# Altium PCB ADCS_BOARDV2.PcbDoc (part 1 of 2)
Units mm, origin at the board's own origin, x right, y up, seen from the top; angles counter-clockwise.
Board outline 92.58 x 92.46 mm, 2 copper layers (Top Layer, Bottom Layer); 139 components, 123 nets, 589 pads, 179 vias.
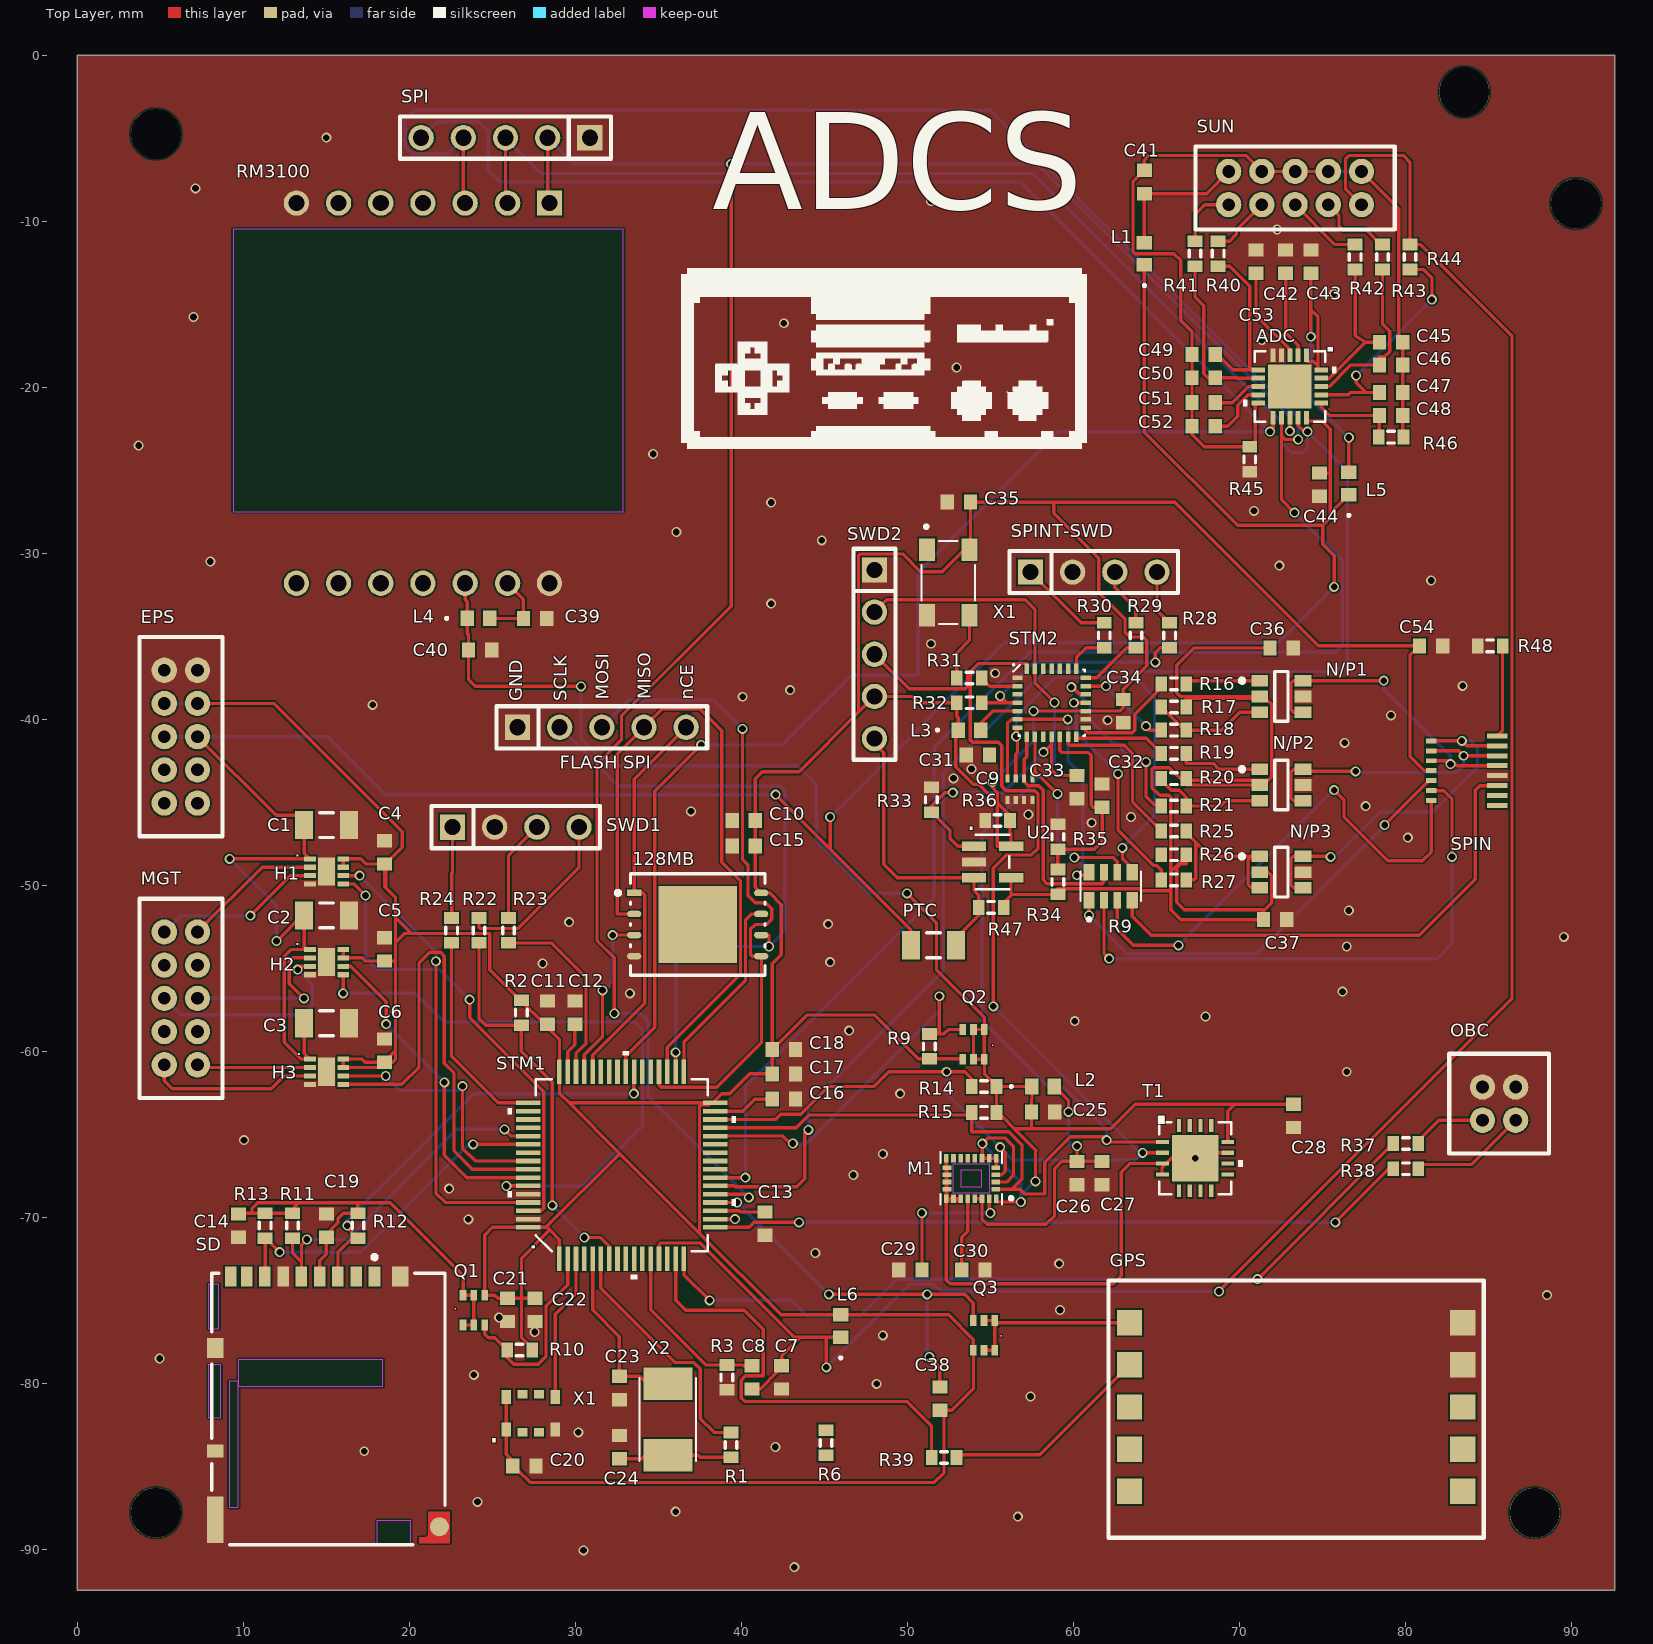
[diagram p0: Top Layer view]
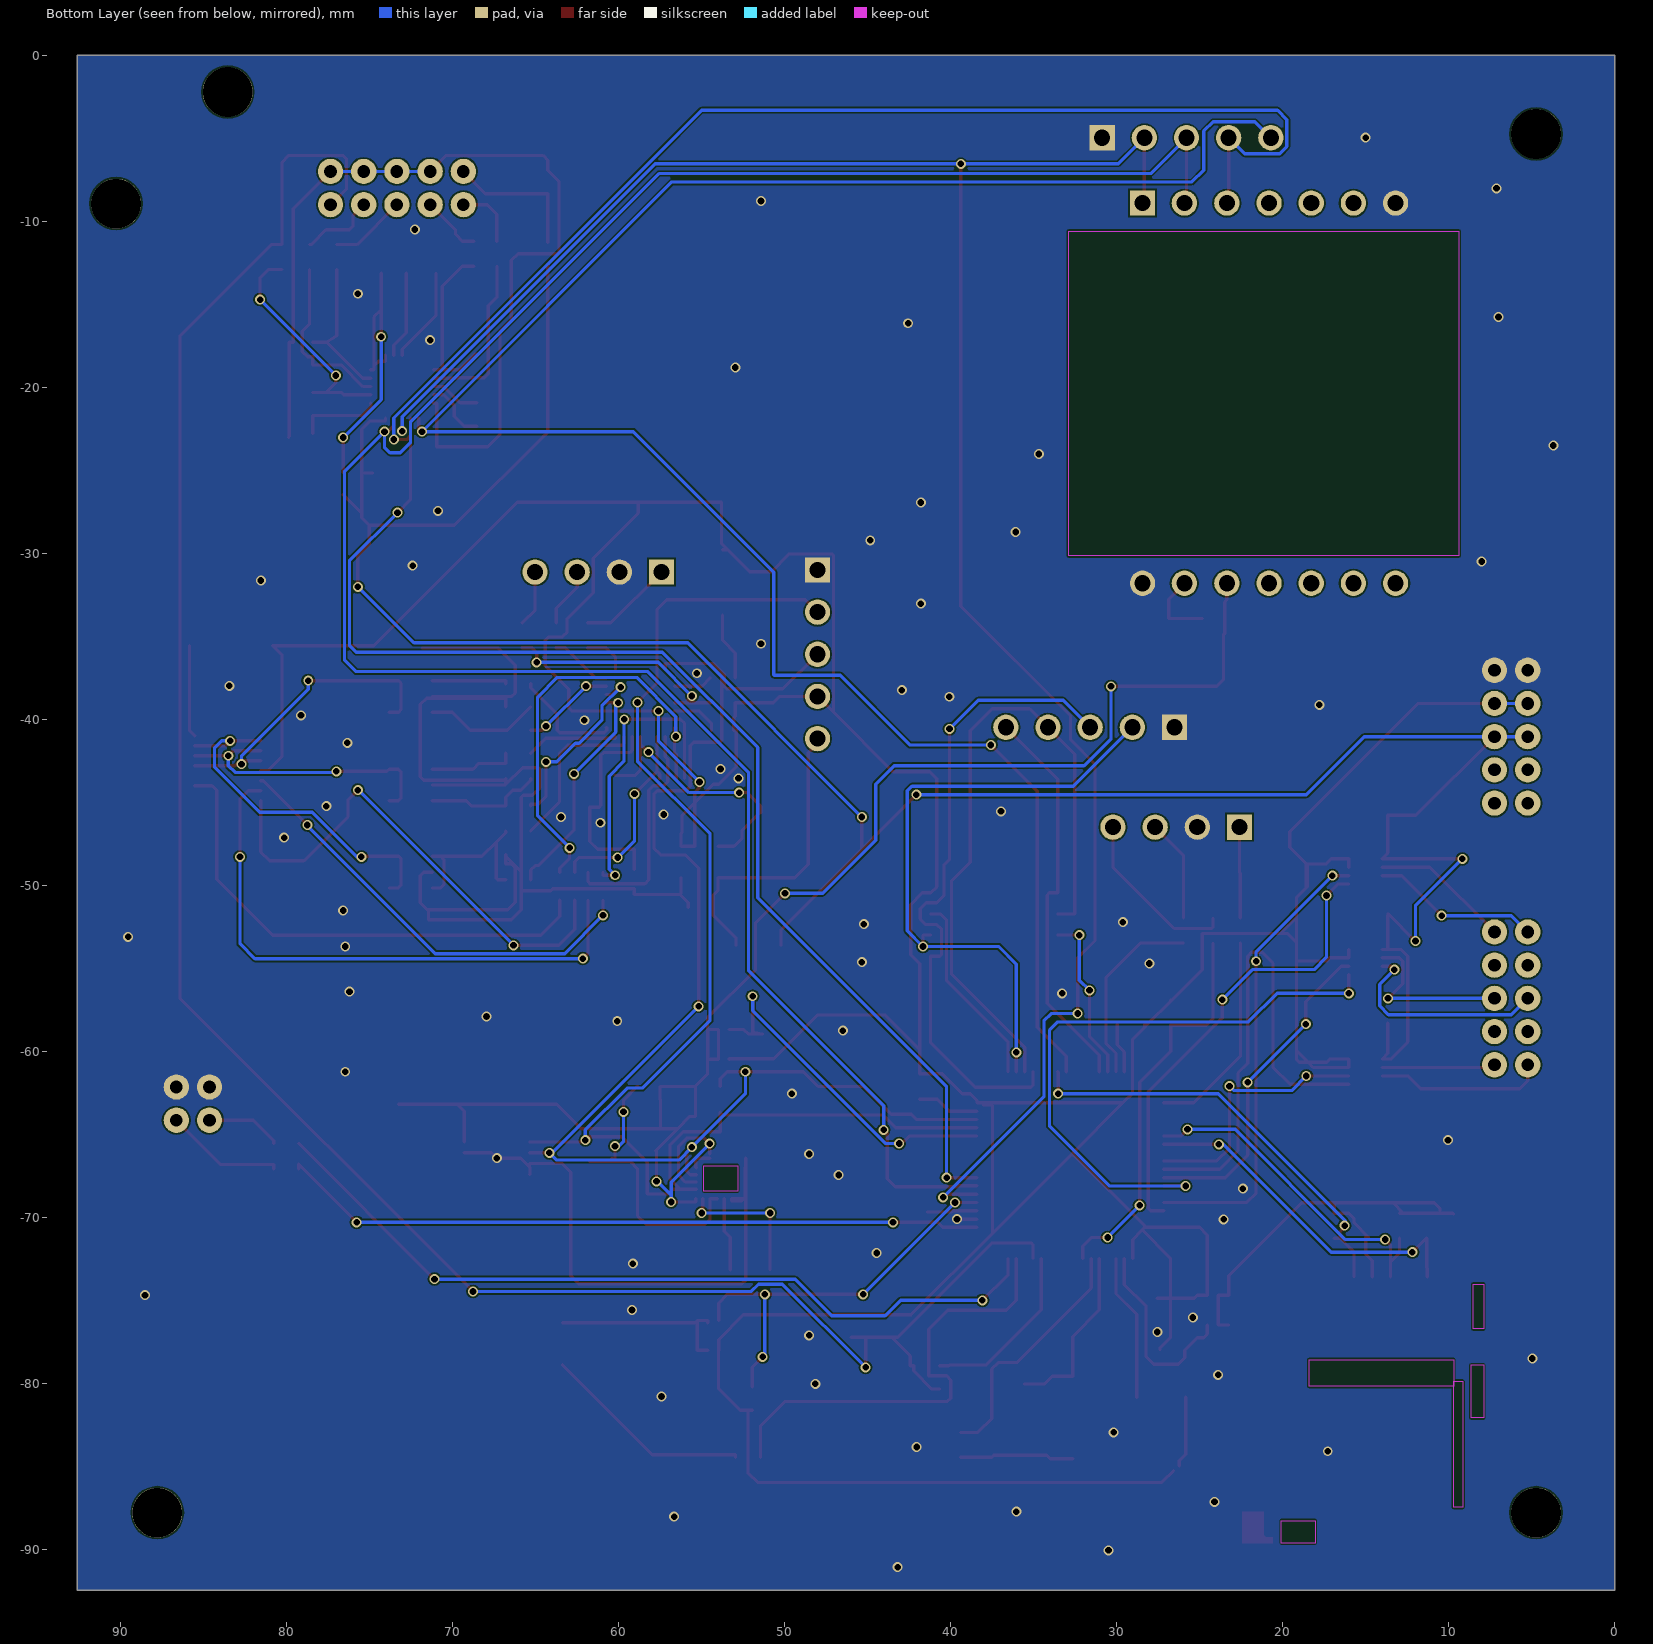
[diagram p1: Bottom Layer view, seen from below]

## Layer stack, top to bottom
Top Solder: solder mask 0.0102, Solder Resist, Dk 3.5
Top Layer: signal copper 0.0356
Dielectric 1: dielectric 0.32, FR-4, Dk 4.8
Bottom Layer: signal copper 0.0356
Bottom Solder: solder mask 0.0102, Solder Resist, Dk 3.5

## Board outline
0,-92.456 92.583,-92.456 92.583,0 0,0

## Design rules (kind name [scope] priority, off if disabled: settings)
Clearance [All] p1: gap=0.1 ignorepadtopadclearanceinfootprint=FALSE
PolygonConnect [All] p1: connectstyle=Direct reliefconductorwidth=0.254 reliefentries=4 polygonreliefangle="90 Angle" airgapwidth=0.254
RoutingTopology [All] p1: topology=Daisy_Simple
RoutingVias [All] p1: holewidth=0.4 width=0.6 viastyle="Through Hole" minholewidth=0.4 minwidth=0.6 maxholewidth=0.4 maxwidth=0.6
ShortCircuit ShortCircuit_1 [InNet('GND') vs InNet('GND_SEN')] p1: allowed=TRUE
ShortCircuit [All] p2: allowed=FALSE
SolderMaskExpansion [All] p1: expansion=0.05
UnRoutedNet [All] p1: checkbadconnections=TRUE
Width [All] p1: maxlimit=0.2 minlimit=0.1 preferedwidth=0.2 minimp=50.000000 maximp=50.000000 favimp=50.000000
27 further rules are at their usual default settings.

## Components (designator, comment, footprint, x,y, rotation, side; value= is the part's Value field where it differs from the comment)
128MB "Comment" ISSI_WSON-8_0 37.358,-52.347 r0 top
ADC "Comment" AD 73.025,-19.939 r270 top
C1 "C1" C1206 15,-46.355 r0 top
C2 "C2" C1206 15,-51.8 r0 top
C3 "C3" C1206 15,-58.3 r0 top
C4 "Comment" 1608[0603] 18.5,-48.006 r90 top
C5 "Comment" 1608[0603] 18.5,-53.848 r90 top
C6 "Comment" 1608[0603] 18.5,-59.944 r90 top
C7 "Comment" 1608[0603] 42.418,-79.629 r90 top
C8 "Comment" 1608[0603] 40.64,-79.629 r90 top
C9 "Comment" W2A4ZC104MAT2A 56.769,-44.196 r0 top
C10 "Comment" 1608[0603] 40.132,-46.08 r0 top
C11 "Comment" 1608[0603] 28.305,-57.658 r90 top
C12 "Comment" 1608[0603] 29.96,-57.658 r90 top
C13 "Comment" 1608[0603] 41.402,-70.363 r90 top
C14 "Comment" 1608[0603] 9.688,-70.485 r90 top
C15 "Comment" 1608[0603] 40.132,-47.625 r0 top
C16 "Comment" 1608[0603] 42.545,-62.865 r0 top
C17 "Comment" 1608[0603] 42.545,-61.341 r0 top
C18 "Comment" 1608[0603] 42.545,-59.874 r0 top
C19 "Comment" 1608[0603] 14.986,-70.485 r90 top
C20 "Comment" 1608[0603] 26.924,-84.963 r0 top
C21 "Comment" 1608[0603] 25.908,-75.565 r90 top
C22 "Comment" 1608[0603] 27.559,-75.565 r90 top
C23 "Comment" 1608[0603] 32.639,-80.264 r90 top
C24 "Comment" 1608[0603] 32.639,-83.82 r90 top
C25 "Comment" 1608[0603] 58.166,-63.627 r0 top
C26 "Comment" 1608[0603] 60.198,-67.315 r90 top
C27 "Comment" 1608[0603] 61.722,-67.315 r90 top
C28 "Comment" 1608[0603] 73.234,-63.872 r90 top
C29 "Comment" 1608[0603] 50.165,-73.152 r0 top
C30 "Comment" 1608[0603] 53.962,-73.152 r0 top
C31 "Comment" 1608[0603] 54.229,-42.143 r0 top
C32 "Comment" 1608[0603] 61.722,-44.577 r90 top
C33 "Comment" 1608[0603] 60.198,-44.069 r90 top
C34 "Comment" 1608[0603] 62.992,-39.489 r90 top
C35 "Comment" 1608[0603] 53.086,-26.903 r0 top
C36 "Comment" 1608[0603] 72.534,-35.687 r0 top
C37 "Comment" 1608[0603] 72.136,-52.049 r0 top
C38 "Comment" 1608[0603] 51.943,-80.899 r90 top
C39 "Comment" 1608[0603] 27.559,-33.909 r0 top
C40 "Comment" 1608[0603] 24.257,-35.814 r0 top
C41 "Comment" 1608[0603] 64.262,-7.62 r90 top
C42 "Comment" 1608[0603] 72.771,-12.411 r90 top
C43 "Comment" 1608[0603] 74.295,-12.411 r90 top
C44 "Comment" 1608[0603] 74.803,-25.848 r90 top
C45 "Comment" 1608[0603] 79.121,-17.272 r0 top
C46 "Comment" 1608[0603] 79.121,-18.648 r0 top
C47 "Comment" 1608[0603] 79.121,-20.299 r0 top
C48 "Comment" 1608[0603] 79.121,-21.684 r0 top
C49 "Comment" 1608[0603] 67.834,-18.001 r0 top
C50 "Comment" 1608[0603] 67.834,-19.41 r0 top
C51 "Comment" 1608[0603] 67.834,-20.914 r0 top
C52 "Comment" 1608[0603] 67.834,-22.331 r0 top
C53 "Comment" 1608[0603] 70.993,-12.411 r90 top
C54 "Comment" 1608[0603] 81.534,-35.56 r0 top
Designator1 "5pinSWD" 5pinSWD 1300.734,1233.043 r0 top
EPS "Comment" "2mm pitch con" 7.228,-37.031 r270 top
"FLASH SPI" "Comment" 5pinSWD 26.505,-40.466 r0 top
GPS "Comment" GPS 76.581,-78.232 r180 top
H1 "Comment" ?DRV8837DSGR? 15,-49.149 r0 top
H2 "Comment" ?DRV8837DSGR? 15,-54.61 r0 top
H3 "Comment" ?DRV8837DSGR? 15,-61.214 r0 top
L1 "Comment" IND_BLM18_0603 64.262,-11.938 r90 top
L2 "Comment" IND_BLM18_0603 58.166,-62.103 r0 top
L3 "Comment" IND_BLM18_0603 53.721,-40.64 r0 top
L4 "Comment" IND_BLM18_0603 24.157,-33.909 r0 top
L5 "Comment" IND_BLM18_0603 76.581,-25.781 r90 top
L6 "Comment" IND_BLM18_0603 45.974,-76.533 r90 top
M1 "Comment" *PQFN43P300X350X102-24N 53.838,-67.641 r180 top
MGT "Comment" "2mm pitch con" 7.228,-52.795 r270 top
N/P1 "Comment" FDC6333C 72.517,-38.608 r0 top
N/P2 "Comment" FDC6333C 72.517,-43.942 r0 top
N/P3 "Comment" FDC6333C 72.517,-49.192 r0 top
OBC "Comment" 2mm4way2row 84.63,-64.135 r90 top
PTC "Comment" C1206 51.562,-53.594 r0 top
Q1 "Comment" Si1401EDH 23.228,-76.466 r0 top
Q2 "Comment" Si1401EDH 54.623,-58.674 r180 top
Q3 "Comment" Si1401EDH 55.258,-76.2 r180 top
R1 "Comment" J1-0603 39.37,-83.693 r90 top
R2 "Comment" J1-0603 26.734,-57.658 r90 top
R3 "Comment" J1-0603 39.116,-79.629 r90 top
R6 "Comment" J1-0603 45.085,-83.566 r90 top
R9 "Comment" J1-0603 51.308,-59.69 r90 top
R9 "Comment" EXB 62.23,-50.038 r90 top
R10 "Comment" J1-0603 26.632,-77.978 r0 top
R11 "Comment" J1-0603 12.954,-70.485 r90 top
R12 "Comment" J1-0603 16.891,-70.485 r90 top
R13 "Comment" J1-0603 11.303,-70.485 r90 top
R14 "Comment" J1-0603 54.61,-62.103 r0 top
R15 "Comment" J1-0603 54.61,-63.659 r0 top
R16 "Comment" J1-0603 66.04,-37.846 r0 top
R17 "Comment" J1-0603 66.04,-39.243 r0 top
R18 "Comment" J1-0603 66.04,-40.64 r0 top
R19 "Comment" J1-0603 66.04,-42.037 r0 top
R20 "Comment" J1-0603 66.04,-43.561 r0 top
R21 "Comment" J1-0603 66.04,-45.212 r0 top
R22 "Comment" J1-0603 24.186,-52.705 r90 top
R23 "Comment" J1-0603 25.964,-52.705 r90 top
R24 "Comment" J1-0603 22.535,-52.705 r90 top
R25 "Comment" J1-0603 66.04,-46.711 r0 top
R26 "Comment" J1-0603 66.04,-48.142 r0 top
R27 "Comment" J1-0603 66.04,-49.657 r0 top
R28 "Comment" J1-0603 65.786,-34.925 r90 top
R29 "Comment" J1-0603 63.754,-34.925 r90 top
R30 "Comment" J1-0603 61.849,-34.925 r90 top
R31 "Comment" J1-0603 53.721,-37.496 r0 top
R32 "Comment" J1-0603 53.721,-38.989 r0 top
R33 "Comment" J1-0603 51.435,-44.831 r90 top
R34 "Comment" J1-0603 59.055,-49.784 r90 top
R35 "Comment" J1-0603 59.055,-47.061 r90 top
R36 "Comment" J1-0603 55.423,-46.08 r0 top
R37 "Comment" J1-0603 80.01,-65.532 r0 top
R38 "Comment" J1-0603 80.01,-67.056 r0 top
R39 "Comment" J1-0603 52.197,-84.455 r0 top
R40 "Comment" J1-0603 68.707,-11.938 r90 top
R41 "Comment" J1-0603 67.31,-11.938 r90 top
R42 "Comment" J1-0603 76.962,-12.138 r90 top
R43 "Comment" J1-0603 78.613,-12.138 r90 top
R44 "Comment" J1-0603 80.264,-12.138 r90 top
R45 "Comment" J1-0603 70.612,-24.324 r90 top
R46 "Comment" J1-0603 79.121,-22.987 r0 top
R47 "Comment" J1-0603 55.034,-51.308 r0 top
R48 "Comment" J1-0603 85.09,-35.56 r0 top
RM3100 "Comment" RM3100 28.428,-31.79 r180 top
SD "Comment" Hirose_Electric_DM3AT-SF-PEJM5_0 15.113,-81.534 r0 top
SPI "Comment" 5pinSWD 30.861,-4.953 r180 top
SPIN "Comment" FH23-15S-0.3SHAW 83.439,-43.081 r90 top
SPINT-SWD "Comment" 4pinSWD 57.404,-31.115 r0 top
STM1 "Comment" LQFP-64 32.778,-66.84 r90 top
STM2 "Comment" *QFN50P400X400X60-28N 58.674,-38.989 r0 top
SUN "Comment" "2mm pitch con" 69.342,-6.985 r0 top
SWD1 "Comment" 4pinSWD 22.591,-46.482 r0 top
SWD2 "Comment" 5pinSWD 48.006,-30.988 r270 top
T1 "Comment" ADT 67.32,-66.421 r0 top
U2 "Comment" INA139 55.118,-48.578 r0 top
X1 "Comment" ?KT3225T3 27.305,-81.788 r0 top
X1 "Comment" *OSC_ECS-TXO-5032-120-TR 52.451,-31.75 r270 top
X2 "Comment" ABM3XTAL 35.56,-82.169 r90 top

## Footprints (in the part's own frame and the unit in brackets; to place one, negate y for a bottom-side part, rotate by r counter-clockwise, add the part's x,y. Pads: shape width x height; smd on the part's side, far side on the other; paste and mask are expansions set on the pad)
2mm4way2row [mil]
  round 60 hole 30: 1(0,0) 2(78.74,0) 3(0,-78.74) 4(78.74,-78.74)
  silkscreen extent -79,-157 157,79, body extent -92,-163 170,85, height 252
"2mm pitch con" [mil]
  round 60 hole 30: 1(0,0) 2(0,-78.74) 3(78.74,0) 4(78.74,-78.74) 5(157.48,0) 6(157.48,-78.74) 7(236.22,0) 8(236.22,-78.74) 9(314.96,0) 10(314.96,-78.74)
  silkscreen extent -79,-138 394,59, body extent -79,-138 394,59, height 260
4pinSWD [mil]
  rect 60x60 hole 38.19: 1(0,0)
  round 60 hole 38.19: 2(100,0) 3(200,0) 4(300,0)
  silkscreen extent -50,-50 350,50
5pinSWD [mil]
  rect 60x60 hole 38.19: 1(0,0)
  round 60 hole 38.19: 2(100,0) 3(200,0) 4(300,0) 5(400,0)
  silkscreen extent -50,-50 450,50
1608[0603] [mm] "Chip Capacitor, Body 1.6x0.8mm, IPC High Density"
  rect 0.8x0.9 smd: 1(-0.7,0) 2(0.7,0)
  body extent -0.87,-0.48 0.87,0.48, height 1.3
*OSC_ECS-TXO-5032-120-TR [mm]
  rect 1.35x0.95 smd: 1(-1.975,-1.275) 2(1.975,-1.275) 3(1.975,1.275) 4(-1.975,1.275)
  silkscreen extent -3.47,-1.6 2.5,1.6
*PQFN43P300X350X102-24N [mm]
  rect 0.28x0.53 smd: 1(-1.505,1.22) 6(-1.505,-1.22) 7(-1.075,-1.22) 8(-0.645,-1.22) 9(-0.215,-1.22) 10(0.215,-1.22) 11(0.645,-1.22) 12(1.075,-1.22) 13(1.505,-1.22) 18(1.505,1.22) 19(1.075,1.22) 20(0.645,1.22) 21(0.215,1.22) 22(-0.215,1.22) 23(-0.645,1.22) 24(-1.075,1.22)
  rect 0.53x0.28 smd: 2(-1.47,0.645) 3(-1.47,0.215) 4(-1.47,-0.215) 5(-1.47,-0.645) 14(1.47,-0.645) 15(1.47,-0.215) 16(1.47,0.215) 17(1.47,0.645)
  Top Layer keep-out region: -0.645,-0.508 0.645,-0.508 0.645,0.508 -0.645,0.508
  Bottom Layer keep-out region: -1.016,-0.762 1.016,-0.762 1.016,0.762 -1.016,0.762
  silkscreen extent -2.5,-1.58 1.86,1.58
*QFN50P400X400X60-28N [mm]
  rect 0.62x0.27 smd: 1(-2.055,1.5) 2(-2.055,1) 3(-2.055,0.5) 4(-2.055,0) 5(-2.055,-0.5) 6(-2.055,-1) 7(-2.055,-1.5) 15(2.055,-1.5) 16(2.055,-1) 17(2.055,-0.5) 18(2.055,0) 19(2.055,0.5) 20(2.055,1) 21(2.055,1.5)
  rect 0.27x0.62 smd: 8(-1.5,-2.055) 9(-1,-2.055) 10(-0.5,-2.055) 11(0,-2.055) 12(0.5,-2.055) 13(1,-2.055) 14(1.5,-2.055) 22(1.5,2.055) 23(1,2.055) 24(0.5,2.055) 25(0,2.055) 26(-0.5,2.055) 27(-1,2.055) 28(-1.5,2.055)
  silkscreen extent -2.34,-2 2,2.34
?DRV8837DSGR? [mil]
  rect 28x12 smd: 1(-39.5,30) 2(-39.5,10) 3(-39.5,-10) 4(-39.5,-30) 5(39.5,-30) 6(39.5,-10) 7(39.5,10) 8(39.5,30)
  rect 40x67 smd paste-33 mask+0: 9(0,0)
  body extent 0,0 10,10, height 10
?KT3225T3 [mm]
  rect 0.55x0.85 smd: 1(-1.475,0.975) 4(1.475,0.975) 5(-1.475,-0.975) 8(1.475,-0.975)
  rect 0.6x0.5 smd: 2(-0.5,1.15) 3(0.5,1.15) 6(-0.5,-1.15) 7(0.5,-1.15)
ABM3XTAL [mm]
  rect 1.95x2.95 smd: 1(-2.15,0) 2(2.15,0)
  silkscreen extent -2.5,-1.7 2.5,1.7
AD [mil]
  rect 32x12 smd: 1(-74.5,39.37) 2(-74.5,19.69) 3(-74.5,0) 4(-74.5,-19.68) 5(-74.5,-39.37) 11(74.5,-39.37) 12(74.5,-19.68) 13(74.5,0) 14(74.5,19.69) 15(74.5,39.37)
  rect 12x32 smd: 6(-39.37,-74.5) 7(-19.69,-74.5) 8(0,-74.5) 9(19.68,-74.5) 10(39.37,-74.5) 16(39.37,74.5) 17(19.68,74.5) 18(0,74.5) 19(-19.69,74.5) 20(-39.37,74.5)
  rect 104x104 smd paste-51.5 mask+0: 21(0,0)
  silkscreen extent -84,-110 84,110, body extent 0,0 10,10, height 10
ADT [mil]
  rect 30x10 smd paste+0: 1(-77.5,38.39) 2(-77.5,12.8) 3(-77.5,-12.8) 4(-77.5,-38.39) 9(77.5,-38.39) 10(77.5,-12.8) 11(77.5,12.8) 12(77.5,38.39)
  rect 10x30 smd paste+0: 5(-38.39,-77.5) 6(-12.8,-77.5) 7(12.8,-77.5) 8(38.39,-77.5) 13(38.39,77.5) 14(12.8,77.5) 15(-12.8,77.5) 16(-38.39,77.5)
  rect 110x110 smd paste-54.5 mask+0: 17(0,0)
  silkscreen extent -85,-86 112,86, body extent 0,0 10,10, height 10
C1206 [mm] "Chip Capacitor, Body 3.2x1.6mm, IPC High Density"
  rect 1.1x1.7 smd: 1(-1.35,0) 2(1.35,0)
  silkscreen extent -0.4,-0.75 0.4,0.75, body extent -1.7,-0.9 1.7,0.9, height 1.3
EXB [mm]
  rect 0.98x0.68 smd: 1(-0.845,1.3) 4(-0.845,-1.3) 5(0.845,-1.3) 8(0.845,1.3)
  rect 0.98x0.48 smd: 2(-0.845,0.4) 3(-0.845,-0.4) 6(0.845,-0.4) 7(0.845,0.4)
  silkscreen extent -2.1,-1.82 0.88,1.82
FDC6333C [mm]
  rect 1x0.7 smd paste+0 mask+0: 1(-1.3,0.95) 2(-1.3,0) 3(-1.3,-0.95) 4(1.3,-0.95) 5(1.3,0) 6(1.3,0.95)
  silkscreen extent -2.5,-1.5 0.4,1.5, body extent -1.9,-1.85 1.9,1.85, height 0.25
FH23-15S-0.3SHAW [mm]
  rect 0.3x0.65 smd: 1(-1.8,1.9) 2(-1.2,1.9) 3(-0.6,1.9) 4(0,1.9) 5(0.6,1.9) 6(1.2,1.9) 7(1.8,1.9)
  rect 0.3x1.25 smd: 8(-2.1,-2.075) 9(-1.5,-2.075) 10(-0.9,-2.075) 11(-0.3,-2.075) 12(0.3,-2.075) 13(0.9,-2.075) 14(1.5,-2.075) 15(2.1,-2.075)
  body extent -3.5,-2.64 3.5,2.16, height 1.24
GPS [mil]
  rect 60x60 smd: 2(-270,325) 2(-270,-75) 2(-270,25) 2(-270,125) 2(-270,225) 2(520,-75) 2(520,25) 2(520,125) 2(520,225) 2(520,325)
  silkscreen extent -320,-175 570,435, body extent -270,-155 517,416, height 122
Hirose_Electric_DM3AT-SF-PEJM5_0 [mm]
  rect 0.7x1.2 smd paste+0 mask+0: 1(2.775,7.975) 2(1.675,7.975) 3(0.575,7.975) 4(-0.525,7.975) 5(-1.625,7.975) 6(-2.725,7.975) 7(-3.825,7.975) 8(-4.925,7.975) 9(-5.875,7.975)
  rect 1x0.8 smd paste+0 mask+0: 10(-6.825,-2.525)
  rect 1x1.2 smd paste+0 mask+0: 11(4.325,7.975) 12(-6.825,3.675)
  rect 1x2.8 smd paste+0 mask+0: 13(-6.825,-6.675)
  round 1.145 smd paste+0 mask+0: 14(6.689,-7.092)
  Top Layer region: 6.025,-6.175 7.325,-6.175 7.325,-8.075 5.475,-8.075 5.475,-7.725 5.875,-7.725 6.025,-7.575 6.025,-6.175
  Keep-Out Layer region: 2.925,-8.075 4.953,-8.075 4.953,-6.725 2.925,-6.725
  Keep-Out Layer region: -5.425,1.375 3.275,1.375 3.275,2.975 -5.425,2.975
  Keep-Out Layer region: -5.969,-5.925 -5.425,-5.925 -5.425,1.675 -5.969,1.675
  Keep-Out Layer region: -7.225,-0.525 -6.475,-0.525 -6.475,2.667 -7.225,2.667
  Keep-Out Layer region: -7.225,4.826 -6.604,4.826 -6.604,7.525 -7.225,7.525
  silkscreen extent -7.02,-8.17 7.02,9.27, body extent -7.42,-8.27 7.43,8.67, height 0.25
INA139 [mil]
  rect 58x22 smd: 1(-44,37.4) 2(-44,0) 3(-44,-37.4) 4(44,-37.4) 5(44,37.4)
  silkscreen extent -40,-65 40,65, body extent 0,0 10,10, height 10
IND_BLM18_0603 [mil]
  rect 32x37 smd: 1(-26.5,0) 2(26.5,0)
  silkscreen extent -78,-3 -73,3, body extent 0,0 10,10, height 10
ISSI_WSON-8_0 [mm]
  rect 0.861x0.392 smd paste+0 mask+0: 1(-3.826,1.905)
  oval 0.861x0.392 smd paste+0 mask+0: 2(-3.826,0.635) 3(-3.826,-0.635) 4(-3.826,-1.905) 5(3.826,-1.905) 6(3.826,-0.635) 7(3.826,0.635) 8(3.826,1.905)
  rect 4.75x4.65 smd paste-1000 mask+0: 9(0,0)
  silkscreen extent -4.93,-3.05 4.05,3.05, body extent -4.36,-3.15 4.36,3.15, height 0.25
J1-0603 [mm] "Chip Resistor, Body 1.6x0.8mm, IPC High Density"
  rect 0.7x0.9 smd: 1(-0.75,0) 2(0.75,0)
  silkscreen extent -0.2,-0.35 0.2,0.35, body extent -0.85,-0.48 0.85,0.48, height 0.9
LQFP-64 [mil]
  rect 58x11 smd: 1(-221.5,147.64) 2(-221.5,127.95) 3(-221.5,108.27) 4(-221.5,88.58) 5(-221.5,68.9) 6(-221.5,49.21) 7(-221.5,29.53) 8(-221.5,9.84) 9(-221.5,-9.84) 10(-221.5,-29.53) 11(-221.5,-49.21) 12(-221.5,-68.9) 13(-221.5,-88.58) 14(-221.5,-108.27) 15(-221.5,-127.95) 16(-221.5,-147.64) 33(221.5,-147.64) 34(221.5,-127.95) 35(221.5,-108.27) 36(221.5,-88.58) 37(221.5,-68.9) 38(221.5,-49.21) 39(221.5,-29.53) 40(221.5,-9.84) 41(221.5,9.84) 42(221.5,29.53) 43(221.5,49.21) 44(221.5,68.9) 45(221.5,88.58) 46(221.5,108.27) 47(221.5,127.95) 48(221.5,147.64)
  rect 11x58 smd: 17(-147.64,-221.5) 18(-127.95,-221.5) 19(-108.27,-221.5) 20(-88.58,-221.5) 21(-68.9,-221.5) 22(-49.21,-221.5) 23(-29.53,-221.5) 24(-9.84,-221.5) 25(9.84,-221.5) 26(29.53,-221.5) 27(49.21,-221.5) 28(68.9,-221.5) 29(88.58,-221.5) 30(108.27,-221.5) 31(127.95,-221.5) 32(147.64,-221.5) 49(147.64,221.5) 50(127.95,221.5) 51(108.27,221.5) 52(88.58,221.5) 53(68.9,221.5) 54(49.21,221.5) 55(29.53,221.5) 56(9.84,221.5) 57(-9.84,221.5) 58(-29.53,221.5) 59(-49.21,221.5) 60(-68.9,221.5) 61(-88.58,221.5) 62(-108.27,221.5) 63(-127.95,221.5) 64(-147.64,221.5)
  silkscreen extent -270,-270 270,270, body extent 0,0 10,10, height 10
RM3100 [mil]
  round 60 hole 38.19: 1(0,0) 2(99.21,0) 2(99.21,-901.57) 3(200,0) 3(200,-901.57) 4(300,0) 4(300,-901.57) 5(400,0) 5(400,-901.57) 6(500,0) 6(500,-901.57) 7(600,0) 7(600,-901.57)
  rect 60x60 hole 38.19: 1(0,-901.57)
  Top Layer keep-out region: -175,-840 750,-840 750,-170 -175,-170
  Bottom Layer keep-out region: -175,-835 750,-835 750,-65 -175,-65
Si1401EDH [mm]
  rect 0.406x0.648 smd mask+0.05: 1(0,0) 2(0.648,0) 3(1.296,0) 4(0,1.79) 5(0.648,1.79) 6(1.296,1.79)
W2A4ZC104MAT2A [mm]
  rect 0.25x0.5 smd: 8(-0.75,-0.65) 8(-0.75,0.65) 8(-0.25,-0.65) 8(-0.25,0.65) 8(0.25,-0.65) 8(0.25,0.65) 8(0.75,-0.65) 8(0.75,0.65)

## Part data
128MB: "IS25LP016D"
C1 C2 C3: "10u"
C4 C5 C6 C28 C41 C42 C43 C44 C53: "100n"
C29: "100nF"
C30: "1nF"
PTC: "PTC"
R48: "10k"

## Free pads (board coordinates)
  round 3 hole 3: 3(4.725,-87.775) 3(4.725,-4.725) 3(83.531,-2.2) 3(87.775,-87.775) 3(90.256,-8.925)

## Via types
v1: diameter 0.6, hole 0.4, Top Layer to Bottom Layer, 179 vias

## Nets (pads, with @x,y where several pads share a name; then routed paths per layer and width w, separated by ;. In a path a pad name is that pad's centre, name@x,y a point inside that pad or via, vN(x,y) a via of type N, cw(c..) or ccw(c..) an arc to the next point about the centre after c; other vN are vias at no path point)
3.3V: 128MB.8 C4.1 C5.1 C6.1 C10.2 C11.1 C15.2 C17.1 C18.1 C20.1 C21.2 C22.2 C34.2 C35.2 C38.1 C54.1 EPS.3 EPS.4 H1.7 H1.8 H2.7 H2.8 H3.7 H3.8 L3.1 L6.2 Q1.6 Q2.6 Q3.6 R2.2 R9.1@51.308,-60.44 R10.2 R32.1 R36.2 SPIN.4 STM1.1 STM1.32 STM1.48 STM1.64 STM2.17 SWD2.4 U2.5 X1.1@25.83,-80.813 X1.4@53.726,-29.775 X1.5 | length 343.8
  Top Layer w0.2: EPS.3@7.228,-39.031 11.828,-39.031 19.558,-46.761 19.558,-47.698 18.567,-48.689 18.567,-50.126 ; H2.8@16.003,-53.848 H2.7@16.003,-54.356 17.145,-54.356 17.337,-54.548 C5.1@18.5,-54.548 19.152,-54.548 ; H1.7@16.003,-48.895 H1.8@16.003,-48.387 17.069,-48.387 17.388,-48.706 C4.1@18.5,-48.706 18.5,-50.058 18.567,-50.126 ; 19.163,-54.548 19.152,-54.548 ; X1.1@25.83,-80.813 X1.5@25.83,-82.763 25.83,-84.256 26.224,-84.65 C20.1@26.224,-84.963 ; C20.1@26.563,-85.237 27.28,-85.954 51.613,-85.954 52.197,-85.369 C38.1@52.197,-81.599 ; R2.2@26.734,-56.908 R2.2@26.682,-56.908 ; R10.2@27.382,-77.978 27.382,-77.876 26.747,-77.242 26.747,-74.865 ; C22.2@27.559,-74.865 26.747,-74.865 ; STM1.1@29.028,-72.466 29.028,-71.323 28.446,-70.741 ; 51.867,-75.87 42.393,-75.87 42.382,-75.86 ; C38.1@51.943,-81.599 C38.1@52.197,-81.599 ; Q2.6@53.327,-60.464 53.327,-60.427 51.321,-60.427 R9.1@51.308,-60.44 50.648,-60.44 47.999,-57.792 43.949,-57.792 41.856,-59.885 C18.1@41.845,-59.896 ; Q3.6@53.962,-77.99 53.962,-77.343 52.479,-75.86 L6.2@45.974,-75.86 42.382,-75.86 ; Q3.6@53.975,-77.978 53.975,-80.289 52.665,-81.599 C38.1@52.197,-81.599 ; v1(55.116,-43.757) 55.116,-44.121 55.394,-44.399 55.394,-45.005 ; v1(57.587,-39.489) STM2.17@60.729,-39.489 62.789,-39.489 62.992,-39.286 C34.2@62.992,-38.789 62.992,-38.176 64.414,-36.754 64.414,-35.23 64.211,-35.027 63.373,-35.027 63.094,-34.747 63.094,-33.934 61.519,-32.36 61.519,-30.277 58.801,-27.559 58.801,-26.924 ; SPIN.4@81.539,-43.081 81.133,-43.081 80.264,-42.212 80.264,-36.13 C54.1@80.834,-35.56 74.752,-35.56 66.096,-26.903 C35.2@53.786,-26.903 53.786,-29.399 X1.4@53.416,-29.769 ; C6.1@18.452,-60.644 19.152,-59.944 ; C6.1@18.452,-60.644 18.136,-60.96 H3.7@16.003,-60.96 H3.8@16.003,-60.452 17.145,-60.452 17.337,-60.644 C6.1@18.452,-60.644 ; C6.1@18.452,-60.644 C6.1@18.5,-60.644 18.999,-60.644 19.152,-60.492 19.152,-59.944 ; 18.567,-50.126 19.152,-50.71 19.152,-51.918 ; 19.152,-59.944 19.152,-54.548 ; 19.152,-54.548 19.152,-53.442 ; 19.152,-53.442 19.71,-52.883 20.117,-52.883 ; 19.152,-53.442 19.152,-51.918 ; 19.152,-51.918 20.117,-52.883 ; 20.117,-52.883 24.841,-52.883 24.841,-55.067 R2.2@26.682,-56.908 ; R2.2@26.682,-56.908 C11.1@28.132,-58.358 ; 26.747,-74.865 26.747,-72.44 28.446,-70.741 ; 26.747,-74.865 C21.2@25.908,-74.865 25.31,-74.865 25.121,-74.676 Q1.6@24.524,-74.676 24.524,-71.06 24.994,-70.59 STM1.64@27.152,-70.59 28.295,-70.59 ; C11.1@28.132,-58.358 C11.1@28.305,-58.531 ; C11.1@28.132,-58.358 C11.1@28.305,-58.358 C11.1@28.305,-58.531 ; 28.295,-70.59 28.446,-70.741 ; 28.295,-70.59 28.25,-70.545 32.562,-66.233 32.756,-66.233 ; C11.1@28.305,-58.531 29.032,-59.258 29.032,-62.509 29.613,-63.09 ; 29.613,-63.09 32.756,-66.233 ; 29.613,-63.09 STM1.32@38.129,-63.09 ; 32.756,-66.233 37.465,-70.942 ; 37.465,-70.942 42.382,-75.86 ; 37.465,-70.942 37.465,-63.297 37.567,-63.195 38.024,-63.195 STM1.32@38.129,-63.09 ; STM1.32@38.129,-63.09 STM1.32@38.404,-63.09 38.404,-62.942 38.811,-62.535 39.294,-62.535 40.488,-61.341 C17.1@41.845,-61.341 C18.1@41.845,-59.896 ; C18.1@41.845,-59.896 C18.1@41.845,-59.874 41.845,-54.712 42.396,-54.161 42.396,-51.148 41.69,-50.442 128MB.8@41.183,-50.442 40.832,-50.091 C15.2@40.832,-47.625 C10.2@40.832,-46.08 40.832,-43.569 41.25,-43.152 43.462,-43.152 47.041,-39.573 ; 47.041,-39.573 SWD2.4@48.006,-38.608 50.292,-38.608 50.673,-38.989 R32.1@52.971,-38.989 52.971,-39.801 53.048,-39.878 L3.1@53.048,-40.64 52.908,-40.64 52.908,-42.839 53.969,-43.9 54.288,-43.9 55.394,-45.005 ; 47.041,-39.573 47.041,-30.124 47.142,-30.023 49.708,-30.023 50.775,-31.09 52.095,-31.09 X1.4@53.416,-29.769 ; X1.4@53.416,-29.769 X1.4@53.726,-29.769 ; X1.4@53.726,-29.769 X1.4@53.726,-29.775 X1.4@53.726,-29.769 ; 55.394,-45.005 56.173,-45.784 R36.2@56.173,-46.08 56.173,-46.826 56.236,-46.888 U2.5@56.236,-47.628 55.394,-47.628 55.394,-45.005
  Bottom Layer w0.2: EPS.4@5.228,-39.031 EPS.3@7.228,-39.031 ; v1(55.116,-43.757) 57.587,-41.287 v1(57.587,-39.489)
3.3V_SEN: C25.1 C28.2 C40.1 L2.1 L4.1 M1.1 M1.3 M1.5 M1.6 M1.7 M1.8 Q2.1 Q2.2 Q2.4 Q2.5 R14.2 R15.2 RM3100.3@23.348,-31.79 T1.12 | length 106.3
  Top Layer w0.2: RM3100.3@23.348,-31.79 23.348,-32.782 23.484,-32.918 L4.1@23.484,-33.909 23.484,-34.826 23.557,-34.9 C40.1@23.557,-35.814 23.557,-37.592 23.963,-37.998 v1(30.328,-37.998) ; v1(49.962,-50.47) 51.74,-52.248 51.74,-55.067 54.635,-57.963 54.635,-61.378 R14.2@55.36,-62.103 ; M1.8@54.483,-66.421 M1.7@54.913,-66.421 M1.6@55.343,-66.421 55.343,-66.961 M1.5@55.308,-66.996 ; M1.8@54.501,-66.167 v1(54.501,-65.545) 54.838,-65.208 55.893,-65.208 56.379,-65.693 56.379,-67.437 55.96,-67.856 M1.3@55.308,-67.856 ; M1.1@55.343,-68.861 55.343,-69.063 v1(56.821,-69.063) ; 57.466,-64.654 57.466,-64.643 ; v1(57.704,-67.818) 57.704,-66.014 57.755,-65.962 56.436,-64.643 ; T1.12@69.289,-65.446 69.289,-63.581 69.698,-63.172 ; C28.2@73.234,-63.172 69.698,-63.172 ; R14.2@55.36,-62.103 L2.1@57.493,-62.103 57.493,-62.864 57.466,-62.89 C25.1@57.466,-63.627 57.466,-64.643 ; R14.2@55.36,-62.103 R15.2@55.36,-63.659 55.36,-63.906 55.699,-63.906 56.436,-64.643 ; 56.436,-64.643 57.466,-64.643 ; 57.466,-64.643 62.23,-64.643 63.701,-63.172 69.698,-63.172 ; Q2.5@53.975,-60.464 Q2.4@54.623,-60.464 Q2.1@54.623,-58.674 Q2.2@53.975,-58.674 Q2.5@53.975,-60.464
  Bottom Layer w0.2: v1(30.328,-37.998) 30.328,-41.148 31.953,-42.774 43.383,-42.774 44.501,-43.891 44.501,-47.269 47.701,-50.47 v1(49.962,-50.47) ; v1(54.501,-65.545) 54.556,-65.605 56.821,-67.87 56.821,-68.655 ; v1(56.821,-69.063) 56.821,-68.655 ; v1(57.704,-67.818) 57.658,-67.818 56.821,-68.655
3.3Vref: ADC.17 C47.1 R44.1 | length 14.1
  Top Layer w0.2: ADC.17@74.917,-20.439 76.556,-20.439 76.695,-20.299 77.607,-20.299 ; v1(77.018,-19.274) 77.018,-19.71 77.607,-20.299 ; C47.1@78.421,-20.299 77.607,-20.299 ; R44.1@80.264,-12.888 81.077,-12.888 81.585,-13.396 v1(81.585,-14.707)
  Bottom Layer w0.2: v1(77.018,-19.274) v1(81.585,-14.707)
3.3VrefR: C7.2 C8.1 L6.1 R44.2 STM1.13 SUN.10 | length 132.2
  Top Layer w0.2: STM1.13@35.028,-72.466 35.028,-71.628 35.13,-71.526 37.49,-71.526 43.17,-77.206 43.546,-77.206 ; C8.1@40.64,-80.329 41.119,-80.329 42.218,-79.23 42.218,-78.929 C7.2@42.418,-78.929 42.418,-78.334 43.546,-77.206 ; v1(45.11,-79.019) 45.11,-77.206 ; L6.1@45.974,-77.206 45.11,-77.206 ; v1(68.758,-74.447) 86.411,-56.794 86.411,-16.9 80.899,-11.388 R44.2@80.264,-11.388 80.264,-6.426 79.858,-6.02 76.606,-6.02 76.378,-6.248 76.378,-8.021 SUN.10@77.342,-8.985 ; 43.546,-77.206 45.11,-77.206
  Bottom Layer w0.2: v1(45.11,-79.019) 50.119,-74.011 51.562,-74.011 51.999,-74.447 v1(68.758,-74.447)
5V: ADC.15 C1.1 C2.1 C3.1 C44.2 EPS.5 EPS.6 H1.1 H2.1 H3.1 L1.1 L5.1 PTC.1 | length 163.6
  Top Layer w0.2: EPS.5@7.228,-41.031 11.967,-45.771 13.65,-45.771 C1.1@13.65,-46.355 13.65,-48.04 H1.1@13.997,-48.387 v1(9.169,-48.387) ; v1(11.989,-53.34) C2.1@13.64,-51.689 ; C3.1@13.65,-58.3 13.65,-60.105 H3.1@13.997,-60.452 13.487,-60.452 12.459,-59.423 12.459,-54.267 12.878,-53.848 H2.1@13.65,-53.848 ; C2.1@13.65,-51.8 H2.1@13.65,-53.848 ; H2.1@13.997,-53.848 H2.1@13.65,-53.848 ; v1(42.059,-44.526) 45.339,-47.807 ; v1(45.339,-45.872) 45.339,-47.807 ; PTC.1@50.212,-53.594 50.212,-52.68 45.339,-47.807 ; L1.1@64.262,-12.611 64.262,-22.682 69.875,-28.296 75.006,-28.296 ; ADC.15@74.025,-21.831 74.025,-22.016 74.27,-22.016 74.276,-22.022 74.981,-22.022 75.463,-22.504 75.463,-25.195 ; C44.2@74.803,-25.148 75.416,-25.148 75.463,-25.195 ; v1(75.692,-32.004) 75.692,-30.128 75.006,-29.442 75.006,-28.296 ; L5.1@76.581,-26.454 75.463,-27.572 ; 75.006,-28.296 75.463,-27.838 75.463,-27.572 ; 75.463,-27.572 75.463,-25.195
  Bottom Layer w0.2: EPS.6@5.228,-41.031 EPS.5@7.228,-41.031 15.072,-41.031 18.567,-44.526 v1(42.059,-44.526) ; v1(9.169,-48.387) 11.989,-51.206 v1(11.989,-53.34) ; v1(45.339,-45.872) 55.829,-35.382 72.314,-35.382 v1(75.692,-32.004)
5V_ST: PTC.2 R47.1 SWD2.5 U2.3 | length 18.3
  Top Layer w0.2: SWD2.5@48.006,-41.148 48.26,-41.402 48.26,-41.685 48.563,-41.988 48.563,-48.721 49.369,-49.528 U2.3@54,-49.528 54,-50.288 54.284,-50.571 R47.1@54.284,-51.308 54.284,-51.79 52.912,-53.162 PTC.2@52.912,-53.594
5V_STEN: C36.1 C37.1 N/P1.2 N/P2.2 N/P3.2 R17.2 R20.2 R26.2 R34.1 R47.2 U2.4 | length 76.7
  Top Layer w0.2: R47.2@55.784,-51.308 55.784,-51.044 56.294,-50.534 ; U2.4@56.236,-49.528 56.236,-50.475 56.294,-50.534 ; R26.2@66.79,-48.142 R26.2@66.79,-48.235 ; R17.2@66.79,-39.243 66.79,-38.71 N/P1.2@71.217,-38.71 ; N/P3.2@71.217,-49.192 71.73,-49.192 71.933,-49.395 71.933,-51.04 71.512,-51.46 ; N/P2.2@71.217,-43.942 R20.2@66.802,-43.942 ; C36.1@71.835,-35.687 67.259,-35.687 66.218,-36.728 66.218,-38.405 66.421,-38.608 N/P1.2@71.217,-38.608 N/P1.2@71.217,-38.71 ; 56.294,-50.534 R34.1@59.055,-50.534 59.055,-50.19 63.957,-50.19 64.084,-50.317 65.735,-50.317 65.862,-50.19 ; 65.862,-50.19 65.862,-49.162 ; 65.862,-50.19 65.862,-51.465 66.446,-52.049 C37.1@71.436,-52.049 71.436,-51.537 71.512,-51.46 ; 65.862,-49.162 65.862,-44.689 65.735,-44.562 65.187,-44.562 64.719,-44.094 64.719,-43.002 64.821,-42.901 65.761,-42.901 R20.2@66.802,-43.942 ; 65.862,-49.162 R26.2@66.79,-48.235 ; R26.2@66.79,-48.235 66.79,-48.692 66.446,-48.692 66.218,-48.92 66.218,-51.003 66.675,-51.46 71.512,-51.46 ; R20.2@66.793,-43.663 71.73,-43.663 71.933,-43.459 71.933,-39.091 71.552,-38.71 N/P1.2@71.217,-38.71 ; R20.2@66.793,-43.663 66.79,-43.663 R20.2@66.79,-43.561 R20.2@66.793,-43.663 ; R20.2@66.793,-43.663 R20.2@66.802,-43.942
AD: R16.1 STM2.15 | length 6.7
  Top Layer w0.2: STM2.15@60.729,-40.489 60.706,-40.489 60.706,-40.64 60.858,-40.792 63.525,-40.792 63.678,-40.64 63.678,-39.687 65.29,-38.075 R16.1@65.29,-37.846
AD_R: N/P1.1 R16.2 | length 4.6
  Top Layer w0.2: R16.2@66.79,-37.846 66.79,-37.658 N/P1.1@71.217,-37.658
ADC_REF: ADC.2 C42.1 | length 5.2
  Top Layer w0.2: C42.1@72.771,-13.111 72.771,-16.696 73.525,-17.45 ADC.2@73.525,-18.047
ADC_REFIN: ADC.3 C53.1 | length 5.8
  Top Layer w0.2: C53.1@70.993,-13.111 70.993,-15.672 73.025,-17.704 ADC.3@73.025,-18.047
ADC_VDD: ADC.1 ADC.20 C43.1 L5.2 | length 18.1
  Top Layer w0.2: ADC.1@74.025,-18.047 74.025,-18.415 74.447,-18.415 74.727,-18.694 ; v1(74.295,-16.942) 74.295,-15.316 ; C43.1@74.295,-13.111 74.295,-15.316 ; ADC.20@74.917,-18.939 74.727,-18.939 74.727,-18.694 ; L5.2@76.581,-25.108 v1(76.581,-23.012) ; 74.295,-15.316 74.727,-15.748 74.727,-18.694
  Bottom Layer w0.2: v1(74.295,-16.942) 74.295,-20.726 v1(76.581,-23.012)
Am: C9.8@56.519,-43.546 R9.5 STM2.7 | length 26.3
  Top Layer w0.2: C9.8@56.519,-43.546 56.519,-42.088 56.619,-41.988 STM2.7@56.619,-40.489 56.54,-40.489 v1(56.54,-41.021) ; v1(62.941,-47.727) 62.941,-48.357 63.53,-48.946 R9.5@63.53,-49.193
  Bottom Layer w0.2: v1(56.54,-41.021) 56.54,-39.827 58.903,-37.465 63.678,-37.465 64.872,-38.659 64.872,-45.796 v1(62.941,-47.727)
Am_RE: R9.4 SPIN.10 | length 30.3
  Top Layer w0.2: R9.4@63.53,-50.883 63.53,-51.846 64.668,-52.984 80.823,-52.984 84.196,-49.612 84.196,-44.261 84.475,-43.981 SPIN.10@85.514,-43.981
Ap: C9.8@56.019,-43.546 R9.8 STM2.6 | length 17.9
  Top Layer w0.2: C9.8@56.019,-43.546 56.019,-40.234 56.264,-39.989 STM2.6@56.619,-39.989 v1(59.649,-39.989) ; v1(60.198,-49.378) 60.93,-49.378 R9.8@60.93,-49.193
  Bottom Layer w0.2: v1(59.649,-39.989) 59.665,-40.005 59.665,-42.52 60.554,-43.409 60.554,-49.022 v1(60.198,-49.378)
Ap_RE: R9.1@60.93,-50.883 SPIN.3 | length 26.8
  Top Layer w0.2: v1(60.93,-51.791) R9.1@60.93,-50.883 ; v1@78.707,-46.355 81.381,-43.681 SPIN.3@81.539,-43.681
  Bottom Layer w0.2: v1(60.93,-51.791) 63.24,-54.1 71.026,-54.1 78.74,-46.386 v1(78.74,-46.355)
AU: R18.1 STM2.20 | length 5.7
  Top Layer w0.2: STM2.20@60.729,-37.989 v1(61.951,-37.989) ; v1(64.364,-40.402) 64.602,-40.64 R18.1@65.29,-40.64
  Bottom Layer w0.2: v1(61.951,-37.989) v1(64.364,-40.402)
AU_R: N/P1.3 R17.1 R18.2 | length 7
  Top Layer w0.2: R17.1@65.29,-39.243 66.687,-40.64 R18.2@66.79,-40.64 68.92,-40.64 70.002,-39.558 N/P1.3@71.217,-39.558
AVDD: C39.1 L4.2 RM3100.2@25.908,-31.79 | length 4.5
  Top Layer w0.2: L4.2@24.83,-33.909 C39.1@26.859,-33.909 26.859,-32.741 RM3100.2@25.908,-31.79
BD: R19.1 STM2.14 | length 5.6
  Top Layer w0.2: STM2.14@60.174,-41.044 60.174,-41.124 64.377,-41.124 R19.1@65.29,-42.037
BD_R: N/P2.1 R19.2 | length 5.2
  Top Layer w0.2: R19.2@66.79,-42.037 66.79,-42.647 68.412,-42.647 68.758,-42.992 N/P2.1@71.217,-42.992
Bm: 
Bp: C9.8@57.019,-43.546 R9.7 STM2.8 | length 13.9
  Top Layer w0.2: STM2.8@57.174,-41.044 57.174,-42.238 57.019,-42.393 C9.8@57.019,-43.546 57.019,-43.736 57.279,-43.996 57.912,-43.996 58.166,-44.25 58.166,-49.657 58.395,-49.886 61.728,-49.886 61.83,-49.784 R9.7@61.83,-49.193
Bp_RE: R9.2@61.83,-50.883 SPIN.2 | length 34.9
  Top Layer w0.2: R9.2@61.83,-50.883 61.83,-54.084 v1(62.146,-54.4) ; SPIN.2@81.539,-44.281 82.308,-44.281 82.791,-44.764 v1(82.791,-48.273)
  Bottom Layer w0.2: v1(62.146,-54.4) 81.896,-54.4 82.791,-53.506 v1(82.791,-48.273)
BU: R21.1 STM2.19 | length 11.2
  Top Layer w0.2: v1(59.868,-38.049) 59.944,-38.049 60.384,-38.489 STM2.19@60.729,-38.489 ; v1(64.364,-42.545) 64.364,-44.653 64.821,-45.11 65.29,-45.11 R21.1@65.29,-45.212
  Bottom Layer w0.2: v1(59.868,-38.049) 60.992,-39.173 60.992,-40.043 62.37,-41.421 62.588,-41.421 63.712,-42.545 v1(64.364,-42.545)